# Altium PCB January_PCBA _PSU.PcbDoc
Units mm, origin at the board's own origin, x right, y up, seen from the top; angles counter-clockwise.
Board outline 73.85 x 93.98 mm, 4 copper layers (Top Layer, Layer 1, Layer 2, Bottom Layer), stack 0.603 mm thick; 76 components, 309 nets, 217 pads, 104 vias.
Unrouted connection lines stored in the file: 4.
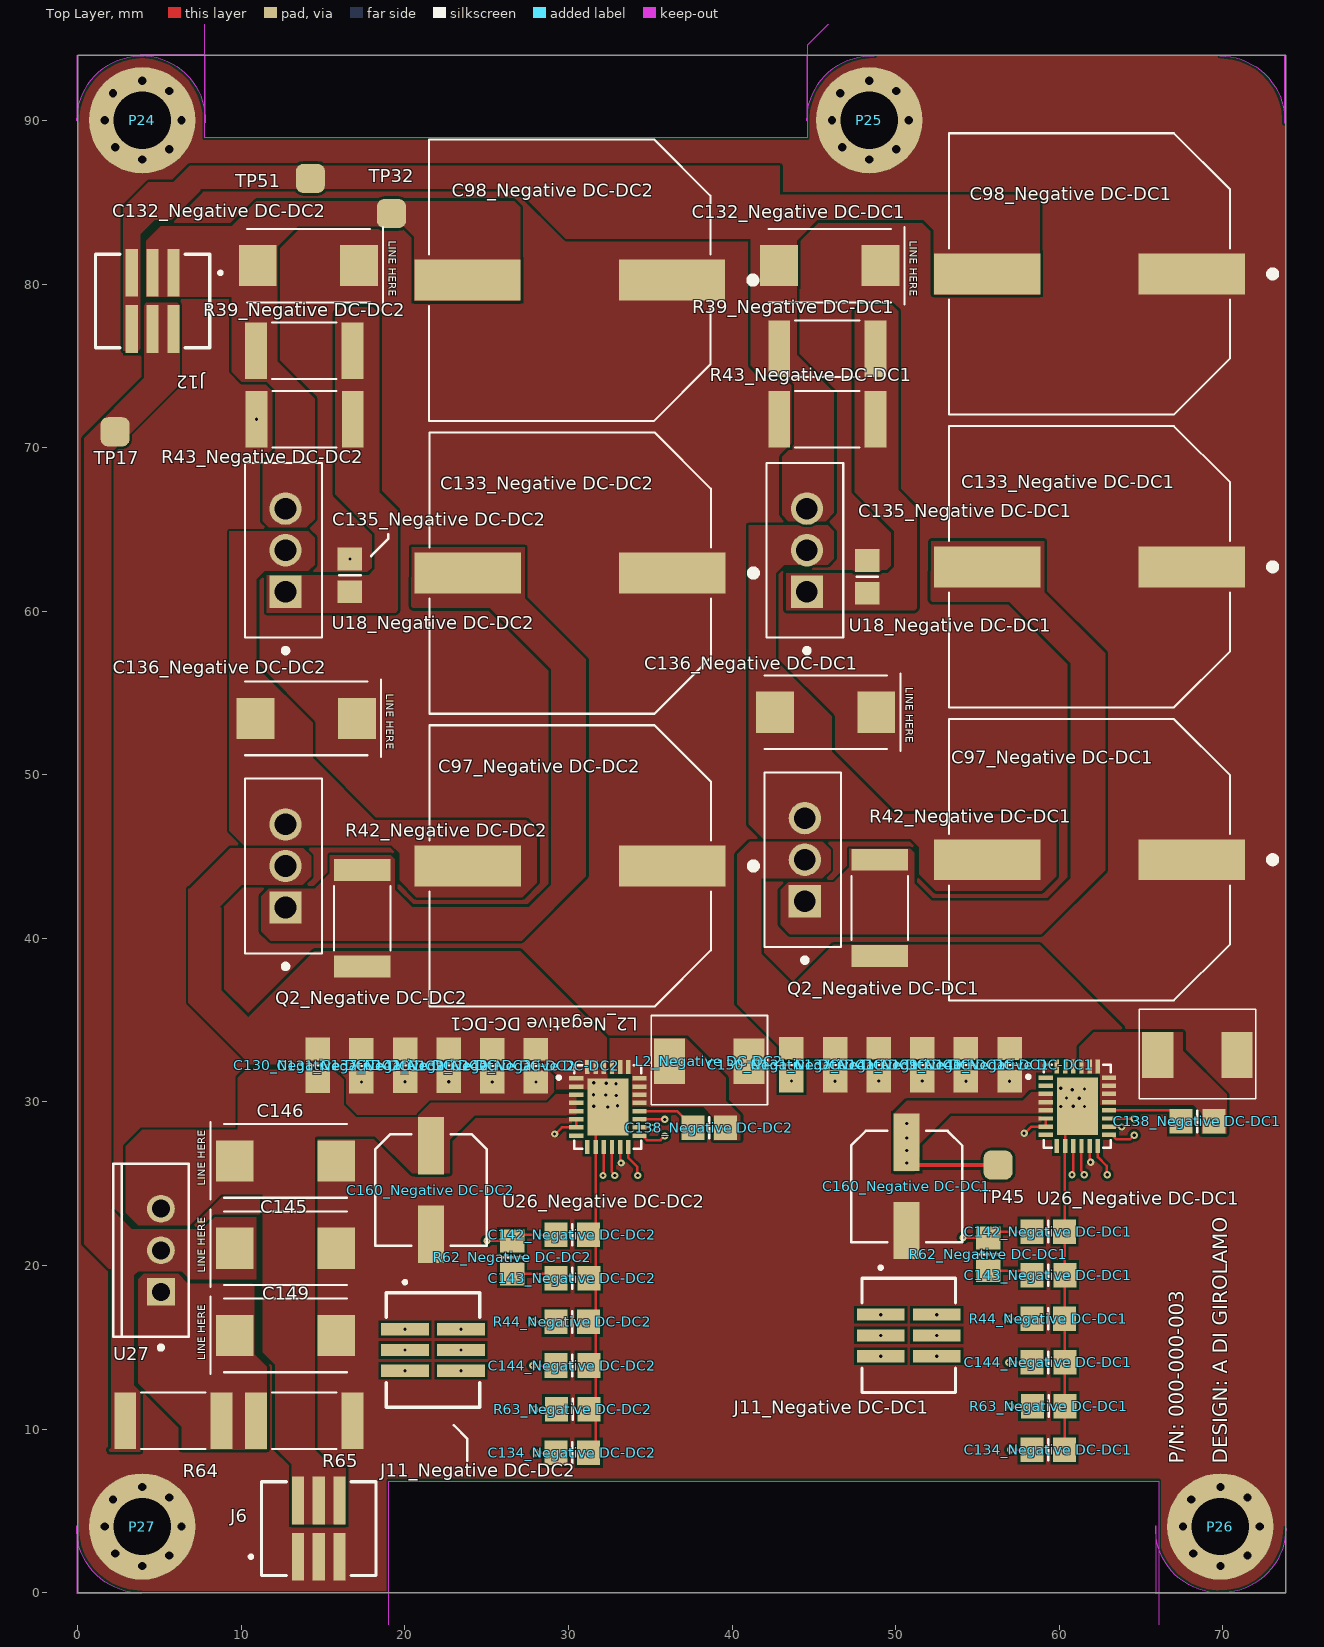
[diagram p0: Top Layer view]
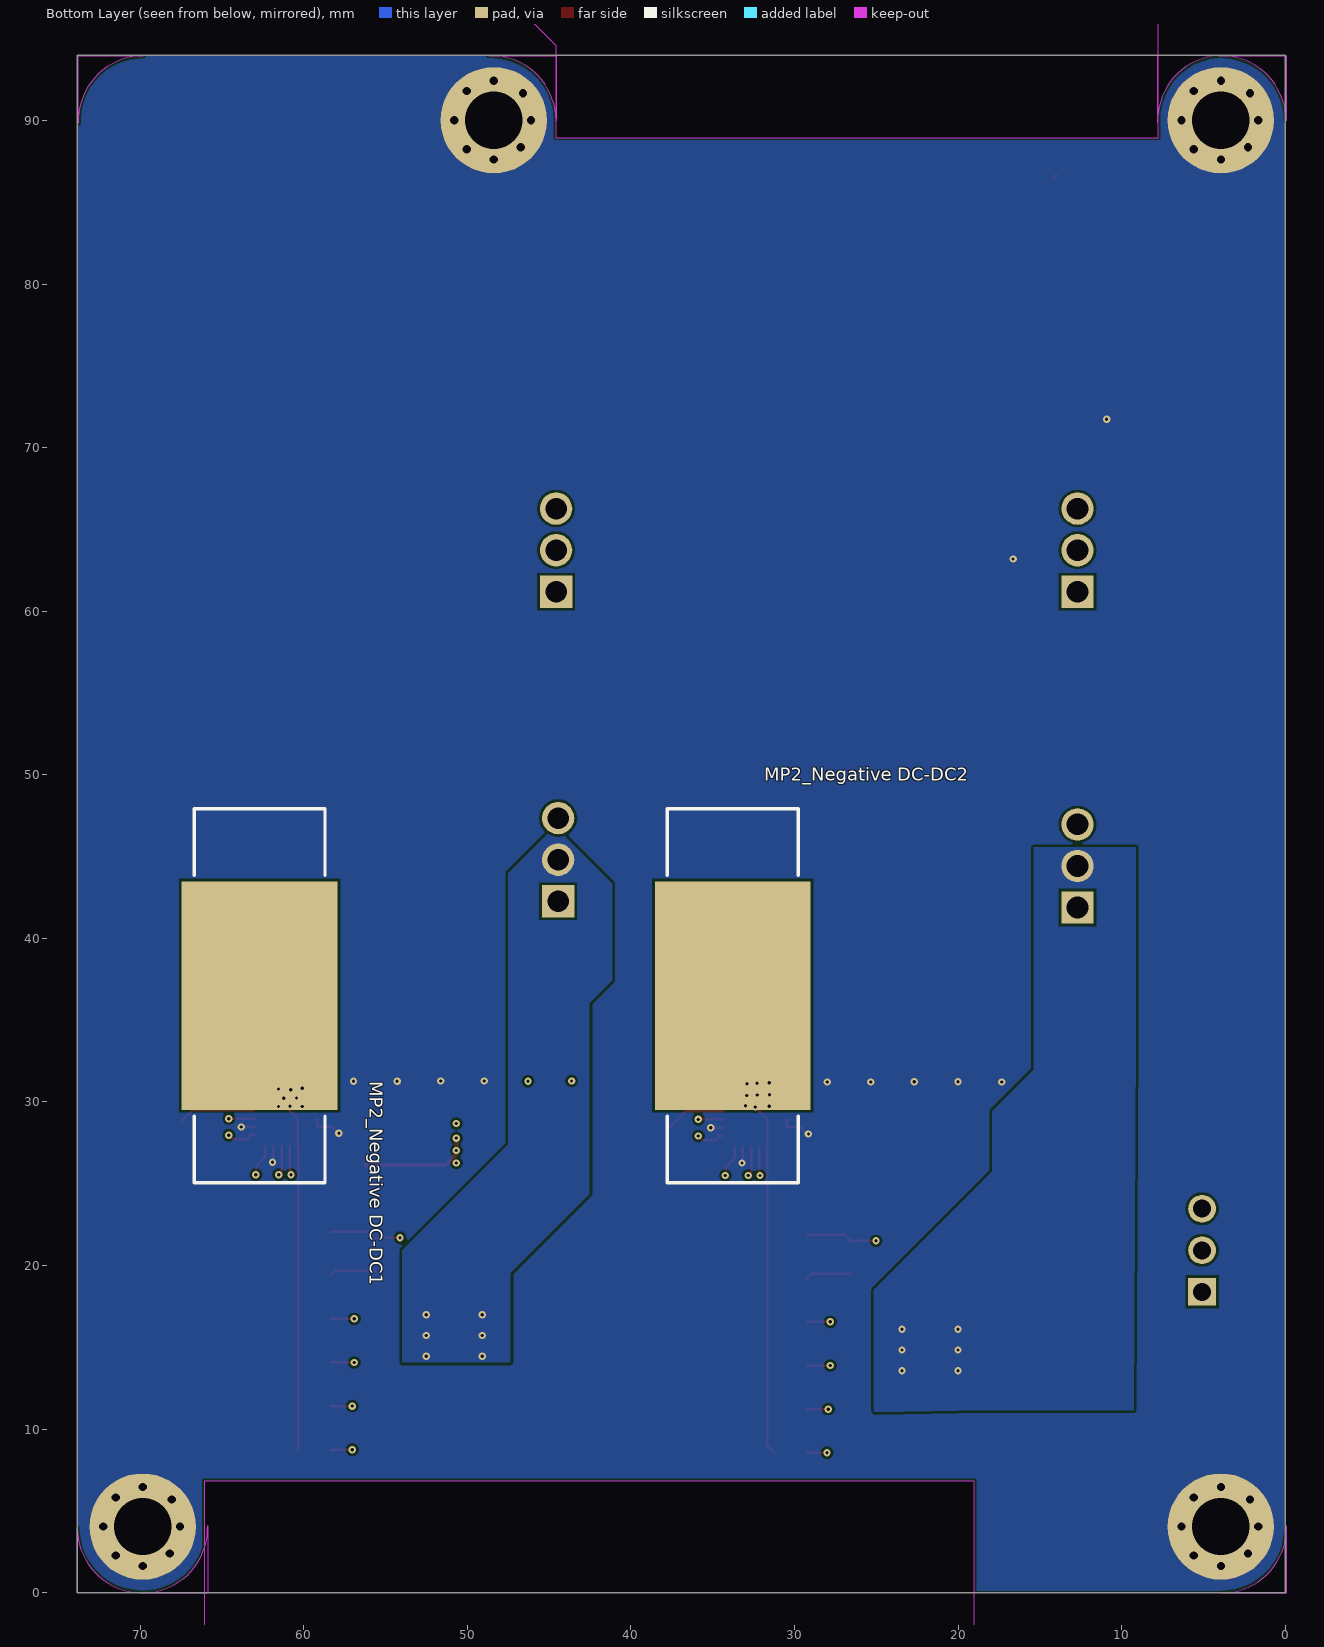
[diagram p1: Bottom Layer view, seen from below]
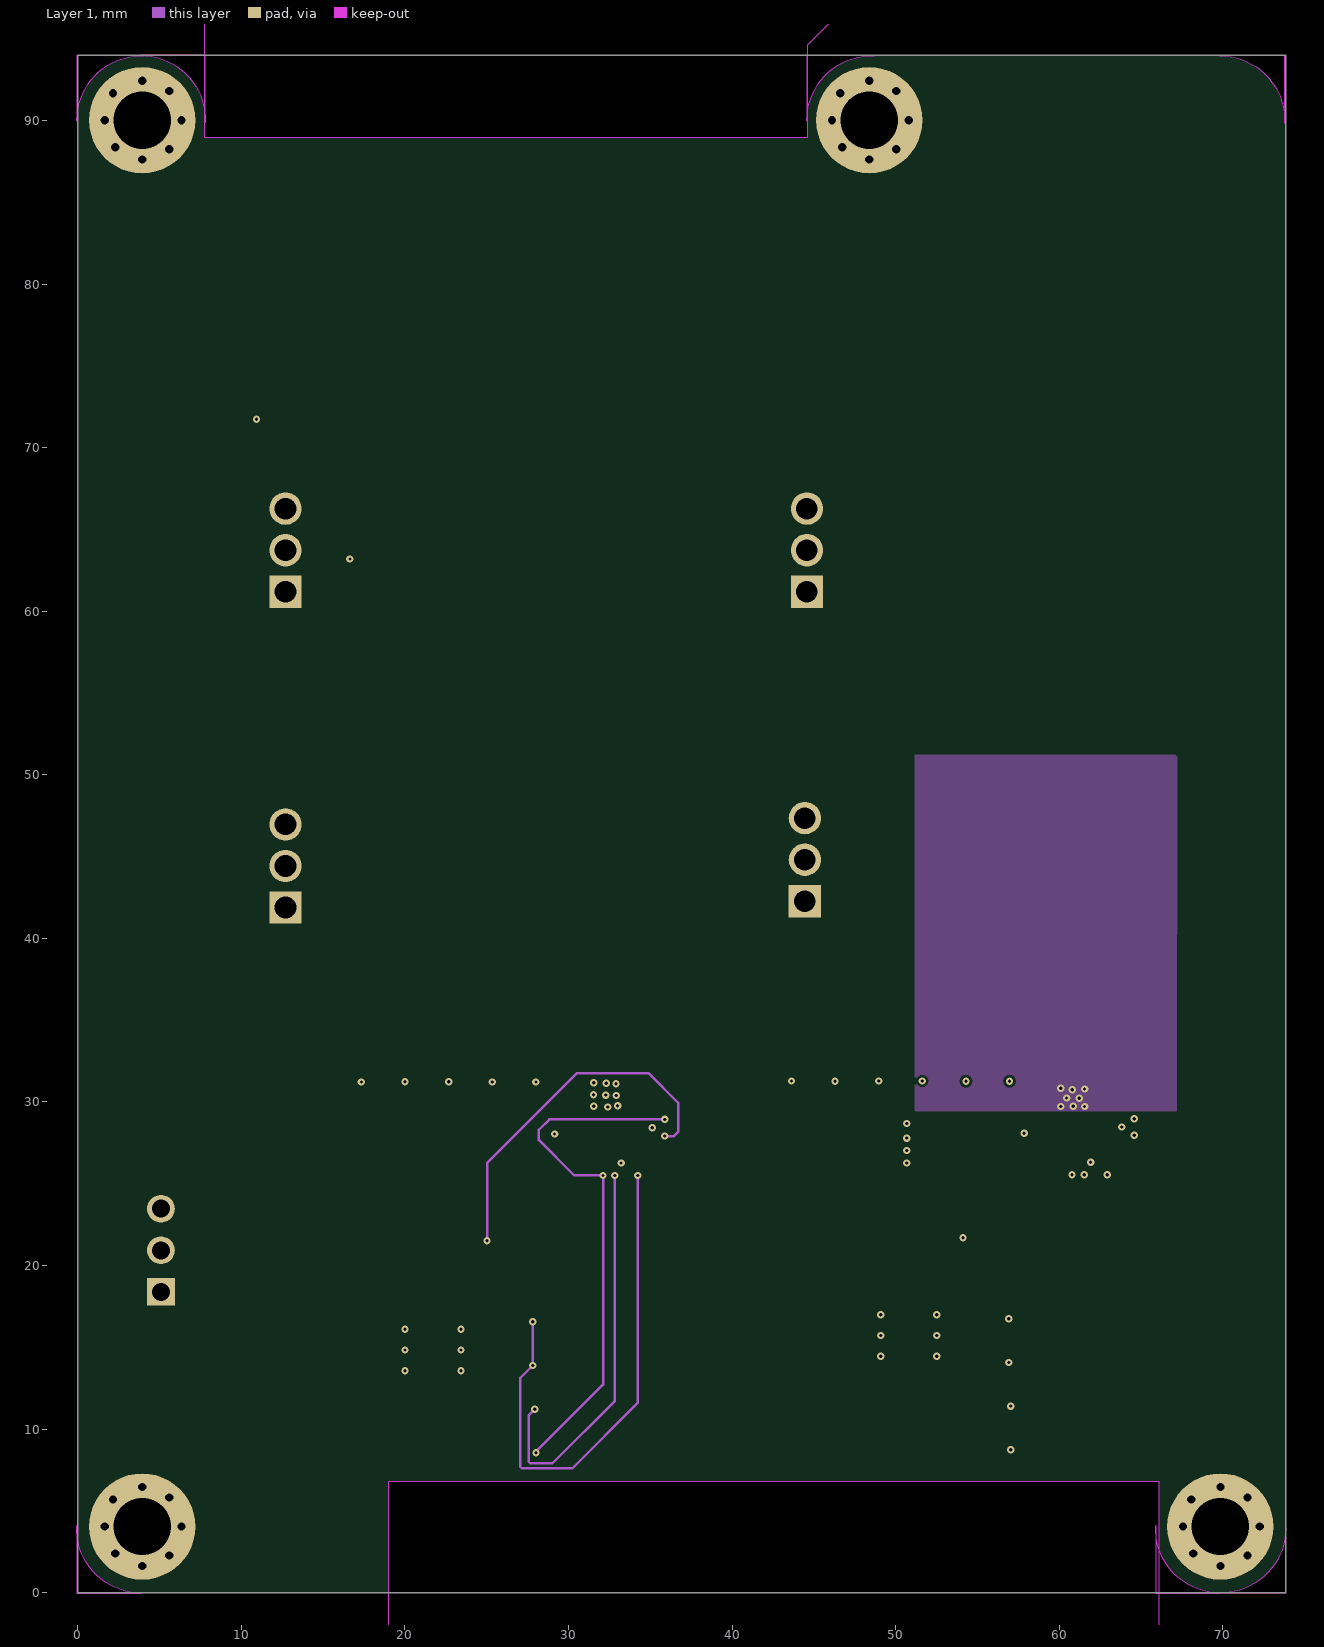
[diagram p2: Layer 1]
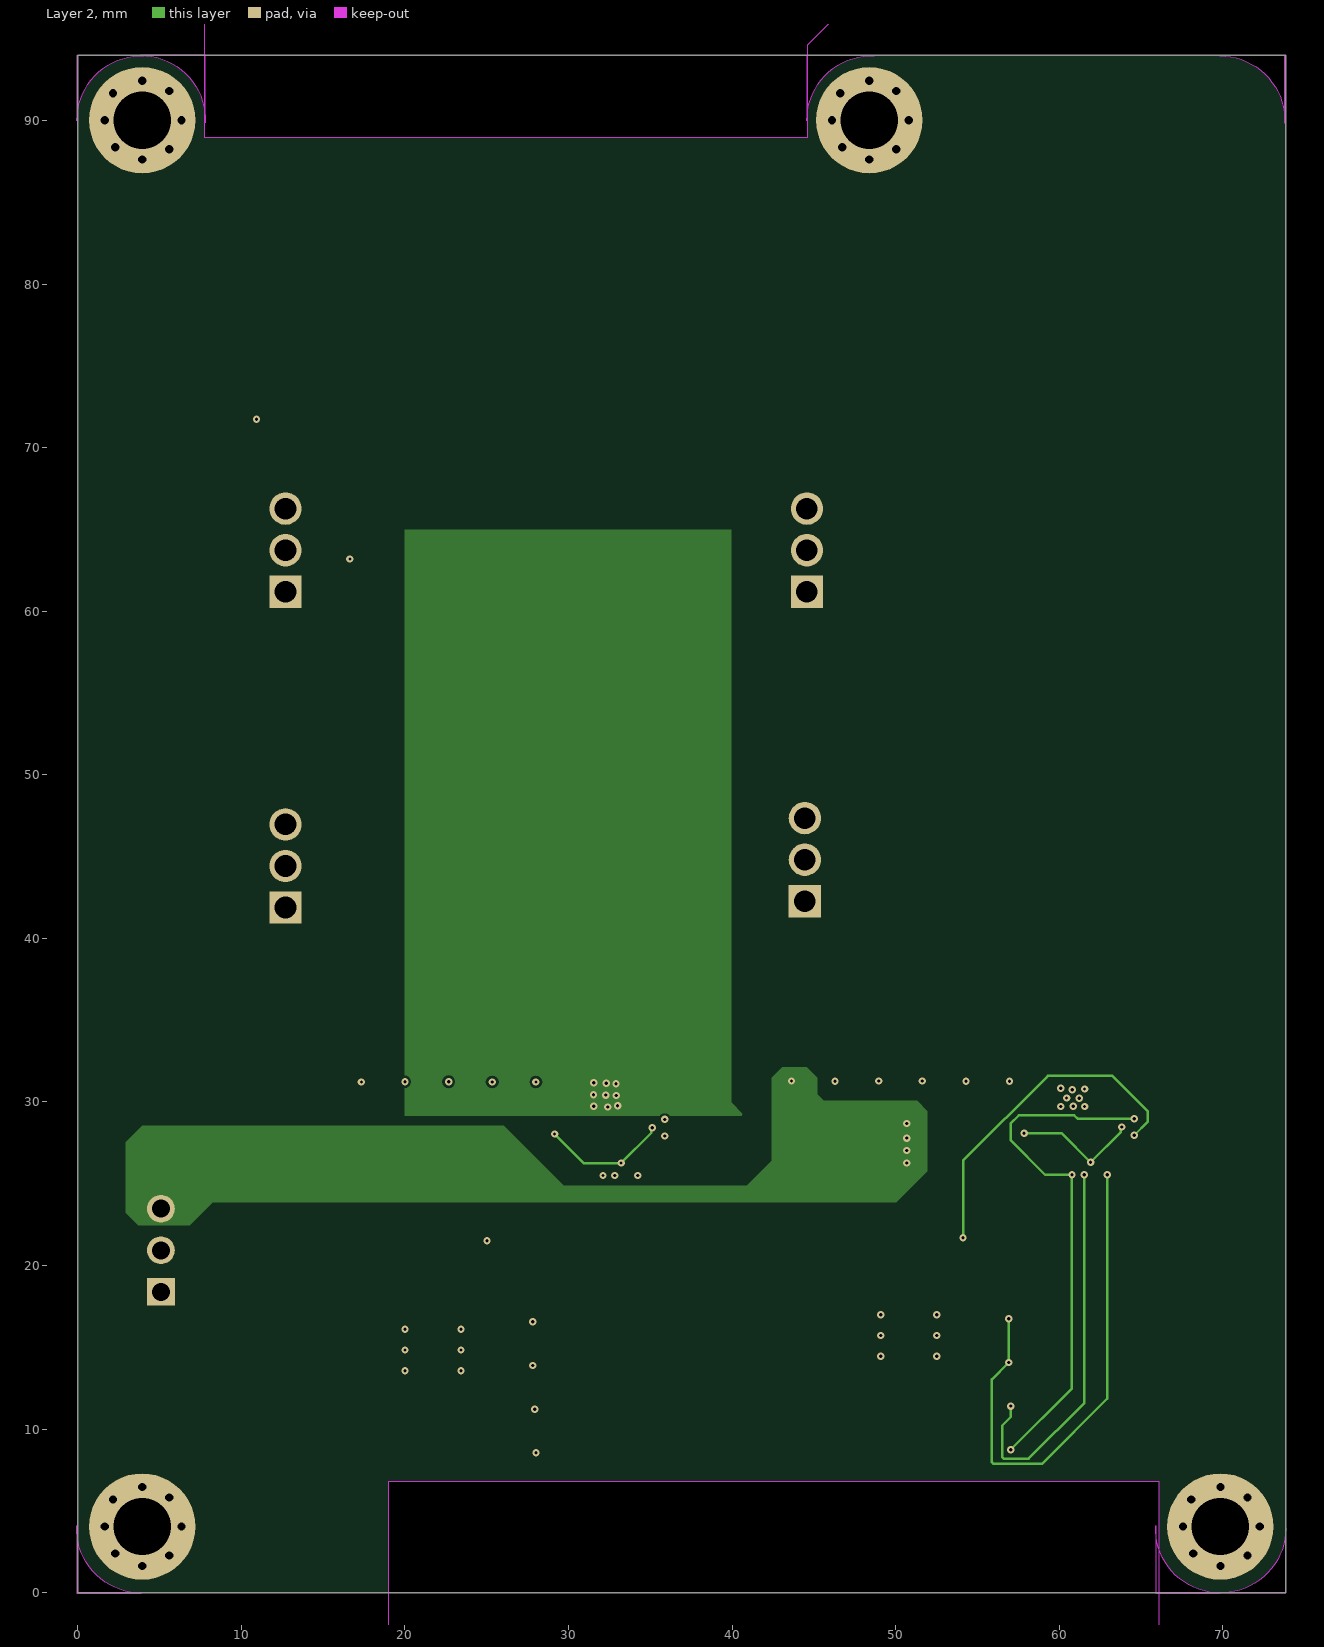
[diagram p3: Layer 2]

## Layer stack, top to bottom
Top Solder: solder mask 0.0102, Solder Resist, Dk 3.5
Top Layer: signal copper 0.0356
Dielectric 2: prepreg 0.0711, PP-006, Dk 4.1
Layer 1: signal copper 0.035
Dielectric 1: dielectric 0.32, FR-4, Dk 4.8
Layer 2: signal copper 0.035
Dielectric 3: prepreg 0.0711, PP-006, Dk 4.1
Bottom Layer: signal copper 0.0356
Bottom Solder: solder mask 0.0102, Solder Resist, Dk 3.5

## Board outline
-0.013,93.98 73.837,93.98 73.84,0 0,0
cut-out: 69.816,93.955 cw(c69.816,89.988) 73.779,89.828 73.779,93.955
cut-out: 44.568,89.991 cw(c48.535,89.991) 48.695,93.955 44.568,93.955
cut-out: -0.059,89.991 cw(c3.907,89.991) 4.067,93.955 -0.059,93.955
cut-out: 3.826,93.98 cw(c3.826,90.014) 7.789,89.853 7.789,93.98
cut-out: 73.844,3.947 cw(c69.877,3.947) 69.717,-0.017 73.844,-0.017
cut-out: 69.847,-0.025 cw(c69.847,3.941) 65.884,4.102 65.884,-0.025
cut-out: 3.887,-0.031 cw(c3.887,3.935) -0.076,4.095 -0.076,-0.031
cut-out: 19.016,-2.235 19.016,6.821 66.082,6.821 66.082,-2.235
cut-out: 7.764,88.944 7.764,96.241 46.212,96.241 44.582,94.611 44.582,88.944

## Design rules (kind name [scope] priority, off if disabled: settings)
Clearance [All] p1: gap=0.152 ignorepadtopadclearanceinfootprint=TRUE
Height [All] p1: minheight=0 maxheight=1000 prefheight=12.7
HoleSize [All] p1: absolutevalues=TRUE maxlimit=25.4 minlimit=0.178 maxpercent=80.000 minpercent=20.000
MinimumAnnularRing [All] p1: minimumring=0.125
PlaneConnect [All] p1: planeconnectstyle=Direct reliefexpansion=0.508 reliefentries=4 reliefconductorwidth=0.254 reliefairgap=0.254
PolygonConnect [All] p1: connectstyle=Direct reliefconductorwidth=0.254 reliefentries=4 polygonreliefangle="90 Angle" airgapwidth=0.254
RoutingVias [All] p1: holewidth=0.711 width=1.27 viastyle="Through Hole" minholewidth=0.711 minwidth=1.27 maxholewidth=0.711 maxwidth=1.27
SolderMaskExpansion [All] p1: expansion=0.102 istentingtop=FALSE
Width [All] p1: maxlimit=25.4 minlimit=0.152 preferedwidth=0.152
27 further rules are at their usual default settings.

## Classes and differential pairs
channel class voltagesource: OPA5481 OPA5482
channel class Small_Relay: "Small Relay 1" "Small Relay 2"
channel class mixer: MIXER1 MIXER2
channel class LOINA: LO1_INA1 LO1_INA2 LO2_INA1 LO2_INA2
channel class LO: LO1 LO2
channel class Large_Relay: "Large Relay 1" "Large Relay 1B" "Large Relay 2" "Large Relay 2B" "Large Relay 3"
channel class high_pass: HP HP2
channel class dcshift_digital: dcshift1 dcshift2
channel class amp: AMP1 AMP2
channel class 7419_SUPPLY: "Negative DC-DC1" "Negative DC-DC2"
channel class 5kHZ_LO_LPF: LO1_HPF LO1_LPF LO2_HPF
component class top_level: J12 TP17 TP32 TP45 TP51
component class Power_Input: J6
component class "Negative DC-DC2": "1_Negative DC-DC2" "C97_Negative DC-DC2" "C98_Negative DC-DC2" "C130_Negative DC-DC2" "C131_Negative DC-DC2" "C132_Negative DC-DC2" "C133_Negative DC-DC2" "C134_Negative DC-DC2" "C135_Negative DC-DC2" "C136_Negative DC-DC2" "C137_Negative DC-DC2" "C138_Negative DC-DC2" "C139_Negative DC-DC2" "C140_Negative DC-DC2" "C141_Negative DC-DC2" "C142_Negative DC-DC2" "C143_Negative DC-DC2" "C144_Negative DC-DC2" "C160_Negative DC-DC2" "J11_Negative DC-DC2" "L2_Negative DC-DC2" "MP2_Negative DC-DC2" "Q2_Negative DC-DC2" "R39_Negative DC-DC2" "R42_Negative DC-DC2" "R43_Negative DC-DC2" "R44_Negative DC-DC2" "R62_Negative DC-DC2" "R63_Negative DC-DC2" "U18_Negative DC-DC2" "U26_Negative DC-DC2"
component class "Negative DC-DC1": "1_Negative DC-DC1" "C97_Negative DC-DC1" "C98_Negative DC-DC1" "C130_Negative DC-DC1" "C131_Negative DC-DC1" "C132_Negative DC-DC1" "C133_Negative DC-DC1" "C134_Negative DC-DC1" "C135_Negative DC-DC1" "C136_Negative DC-DC1" "C137_Negative DC-DC1" "C138_Negative DC-DC1" "C139_Negative DC-DC1" "C140_Negative DC-DC1" "C141_Negative DC-DC1" "C142_Negative DC-DC1" "C143_Negative DC-DC1" "C144_Negative DC-DC1" "C160_Negative DC-DC1" "J11_Negative DC-DC1" "L2_Negative DC-DC1" "MP2_Negative DC-DC1" "Q2_Negative DC-DC1" "R39_Negative DC-DC1" "R42_Negative DC-DC1" "R43_Negative DC-DC1" "R44_Negative DC-DC1" "R62_Negative DC-DC1" "R63_Negative DC-DC1" "U18_Negative DC-DC1" "U26_Negative DC-DC1"
component class MECH: P24 P25 P26 P27
component class "+24 Linear": C145 C146 C149 R64 R65 U27

## Components (designator, comment, footprint, x,y, rotation, side; value= is the part's Value field where it differs from the comment)
"C97_Negative DC-DC1" "1mF" EEVFK1V152M 61.846,44.806 r180 top value=.01uf (schematic designator C97)
"C97_Negative DC-DC2" "1mF" EEVFK1V152M 30.096,44.425 r180 top value=.01uf (schematic designator C97)
"C98_Negative DC-DC1" "1mF" EEVFK1V152M 61.846,80.62 r180 top value=.01uf (schematic designator C98)
"C98_Negative DC-DC2" "1mF" EEVFK1V152M 30.069,80.239 r180 top value=.01uf (schematic designator C98)
"C130_Negative DC-DC1" "478-10836-1-ND" 6-0805_M 43.626,32.28 r270 top value=.1uF (schematic designator C130)
"C130_Negative DC-DC2" "478-10836-1-ND" 6-0805_M 14.669,32.233 r270 top value=.1uF (schematic designator C130)
"C131_Negative DC-DC1" "490-10749-1-ND" 6-0805_M 46.293,32.264 r270 top value=33uF (schematic designator C131)
"C131_Negative DC-DC2" "490-10749-1-ND" 6-0805_M 17.336,32.217 r270 top value=33uF (schematic designator C131)
"C132_Negative DC-DC1" "10uF" Tantalum_2917 45.971,81.128 r180 top (schematic designator C132)
"C132_Negative DC-DC2" "10uF" Tantalum_2917 14.094,81.128 r180 top (schematic designator C132)
"C133_Negative DC-DC1" "1mF" EEVFK1V152M 61.846,62.713 r180 top value=.01uf (schematic designator C133)
"C133_Negative DC-DC2" "1mF" EEVFK1V152M 30.096,62.332 r180 top value=.01uf (schematic designator C133)
"C134_Negative DC-DC1" "1276-6458-1-ND" 6-0805_M 59.322,8.738 r0 top value=2.2uF (schematic designator C134)
"C134_Negative DC-DC2" "1276-6458-1-ND" 6-0805_M 30.223,8.551 r0 top value=2.2uF (schematic designator C134)
"C135_Negative DC-DC1" "490-10749-1-ND" 6-0805_M 48.257,62.094 r90 top value=22uF (schematic designator C135)
"C135_Negative DC-DC2" "490-10749-1-ND" 6-0805_M 16.634,62.189 r90 top value=22uF (schematic designator C135)
"C136_Negative DC-DC1" "10uF" Tantalum_2917 45.717,53.823 r180 top (schematic designator C136)
"C136_Negative DC-DC2" "10uF" Tantalum_2917 13.967,53.442 r180 top (schematic designator C136)
"C137_Negative DC-DC1" "490-10749-1-ND" 6-0805_M 48.96,32.28 r270 top value=22uF (schematic designator C137)
"C137_Negative DC-DC2" "490-10749-1-ND" 6-0805_M 20.003,32.233 r270 top value=22uF (schematic designator C137)
"C138_Negative DC-DC1" "478-10836-1-ND" 6-0805_M 68.45,28.804 r0 top value=.1uF (schematic designator C138)
"C138_Negative DC-DC2" "478-10836-1-ND" 6-0805_M 38.605,28.423 r0 top value=.1uF (schematic designator C138)
"C139_Negative DC-DC1" "490-10749-1-ND" 6-0805_M 54.294,32.264 r270 top value=22uF (schematic designator C139)
"C139_Negative DC-DC2" "490-10749-1-ND" 6-0805_M 25.337,32.217 r270 top value=22uF (schematic designator C139)
"C140_Negative DC-DC1" "490-10749-1-ND" 6-0805_M 56.961,32.264 r270 top value=22uF (schematic designator C140)
"C140_Negative DC-DC2" "490-10749-1-ND" 6-0805_M 28.004,32.217 r270 top value=22uF (schematic designator C140)
"C141_Negative DC-DC1" "490-10749-1-ND" 6-0805_M 51.627,32.28 r270 top value=22uF (schematic designator C141)
"C141_Negative DC-DC2" "490-10749-1-ND" 6-0805_M 22.67,32.233 r270 top value=22uF (schematic designator C141)
"C142_Negative DC-DC1" "399-1151-1-ND" 6-0805_M 59.322,22.073 r0 top value=220pF (schematic designator C142)
"C142_Negative DC-DC2" "399-1151-1-ND" 6-0805_M 30.223,21.886 r0 top value=220pF (schematic designator C142)
"C143_Negative DC-DC1" "399-1153-1-ND" 6-0805_M 59.338,19.406 r0 top value=3.3nF (schematic designator C143)
"C143_Negative DC-DC2" "399-1153-1-ND" 6-0805_M 30.239,19.219 r0 top value=3.3nF (schematic designator C143)
"C144_Negative DC-DC1" "399-7994-1-ND" 6-0805_M 59.338,14.072 r0 top value=22uF (schematic designator C144)
"C144_Negative DC-DC2" "399-7994-1-ND" 6-0805_M 30.239,13.885 r0 top value=22uF (schematic designator C144)
C145 "10uF" Tantalum_2917 12.697,21.057 r0 top
C146 "10uF" Tantalum_2917 12.697,26.391 r0 top
C149 "22uF" Tantalum_2917 12.697,15.723 r0 top
"C160_Negative DC-DC1" "UUD1H220MCL1GS" NIC-CAPA2-6.3X5.8_V 50.67,24.834 r270 top (schematic designator C160)
"C160_Negative DC-DC2" "UUD1H220MCL1GS" NIC-CAPA2-6.3X5.8_V 21.587,24.613 r270 top (schematic designator C160)
J6 "TFC-103-02-F-D" SAMTEC_TFC-103-02-F-D 14.729,3.912 r0 top
"J11_Negative DC-DC1" "TFC-103-02-F-D" SAMTEC_TFC-103-02-F-D 50.797,15.723 r270 top (schematic designator J11)
"J11_Negative DC-DC2" "TFC-103-02-F-D" SAMTEC_TFC-103-02-F-D 21.714,14.834 r270 top (schematic designator J11)
J12 "TFC-103-02-F-D" SAMTEC_TFC-103-02-F-D 4.569,78.969 r180 top
"L2_Negative DC-DC1" "10uH" IHLP2020BZER100M01 68.45,32.868 r180 top (schematic designator L2)
"L2_Negative DC-DC2" "10uH" IHLP2020BZER100M01 38.605,32.487 r180 top (schematic designator L2)
"MP2_Negative DC-DC1" "573100D00010G" FP-573100D00010G-MFG 62.697,36.492 r270 bottom (schematic designator MP2)
"MP2_Negative DC-DC2" "573100D00010G" FP-573100D00010G-MFG 33.772,36.492 r90 bottom (schematic designator MP2)
P24 "M3 Mounting Hole" MH-M3 3.934,90.018 r0 top
P25 "M3 Mounting Hole" MH-M3 48.384,90.018 r0 top
P26 "M3 Mounting Hole" MH-M3 69.847,4.039 r0 top
P27 "M3 Mounting Hole" MH-M3 3.934,4.039 r0 top
"Q2_Negative DC-DC1" "PNP" TO-220-3 44.447,42.266 r90 top (schematic designator Q2)
"Q2_Negative DC-DC2" "PNP" TO-220-3 12.697,41.885 r90 top (schematic designator Q2)
"R39_Negative DC-DC1" "100" 2512_SMD 45.821,76.048 r180 top value=1K (schematic designator R39)
"R39_Negative DC-DC2" "100" 2512_SMD 13.84,75.921 r180 top value=1K (schematic designator R39)
"R42_Negative DC-DC1" "10" 2512_SMD 49.019,41.862 r90 top (schematic designator R42)
"R42_Negative DC-DC2" "10" 2512_SMD 17.396,41.227 r90 top (schematic designator R42)
"R43_Negative DC-DC1" "1909" 2512_SMD 45.821,71.73 r0 top value=1K (schematic designator R43)
"R43_Negative DC-DC2" "1909" 2512_SMD 13.863,71.73 r0 top value=1K (schematic designator R43)
"R44_Negative DC-DC1" "311-360KCRCT-ND" 6-0805_M 59.322,16.739 r180 top value=480K (schematic designator R44)
"R44_Negative DC-DC2" "311-360KCRCT-ND" 6-0805_M 30.223,16.552 r180 top value=480K (schematic designator R44)
"R62_Negative DC-DC1" "P20607CT-ND" 6-0805_M 55.655,20.676 r90 top value=1.33K (schematic designator R62)
"R62_Negative DC-DC2" "P20607CT-ND" 6-0805_M 26.556,20.489 r90 top value=1.33K (schematic designator R62)
"R63_Negative DC-DC1" "P100KCCT-ND" 6-0805_M 59.354,11.405 r180 top value=100K (schematic designator R63)
"R63_Negative DC-DC2" "P100KCCT-ND" 6-0805_M 30.255,11.218 r180 top value=100K (schematic designator R63)
R64 "121" 2512_SMD 5.839,10.516 r180 top value=1K
R65 "2.2K" 2512_SMD 13.84,10.516 r180 top value=1K
TP17 "TP" Test_point 2.283,70.968 r90 top
TP32 "TP" Test_point 19.174,84.303 r90 top
TP45 "TP" Test_point 56.258,26.137 r90 top
TP51 "TP" Test_point 14.221,86.462 r90 top
"U18_Negative DC-DC1" "LT1033" TO-220-3 44.574,61.189 r90 top (schematic designator U18)
"U18_Negative DC-DC2" "LT1033" TO-220-3 12.697,61.189 r90 top (schematic designator U18)
"U26_Negative DC-DC1" "LTC7149IUFD#PBF" QFN50P500X400X80-29N 61.107,29.736 r0 top (schematic designator U26)
"U26_Negative DC-DC2" "LTC7149IUFD#PBF" QFN50P500X400X80-29N 32.404,29.689 r0 top (schematic designator U26)
U27 "LT1085CT#PBF" LT-T-3 5.077,20.93 r180 top

## Footprints (in the part's own frame and the unit in brackets; to place one, negate y for a bottom-side part, rotate by r counter-clockwise, add the part's x,y. Pads: shape width x height; smd on the part's side, far side on the other; paste and mask are expansions set on the pad)
6-0805_M [mm] "Chip Resistor, Body 2.0x1.2mm, IPC Low Density"
  rect 1.4x1.5 smd: 1(-1,0) 2(1,0)
  silkscreen extent 0,-0.65 0,0.65, body extent -1.07,-0.7 1.07,0.7, height 0.7
2512_SMD [mm]
  rect 1.33x3.46 smd: 1(-2.944,0) 2(2.944,0)
  silkscreen extent -1.96,-1.73 1.96,1.73, body extent -3.15,-1.6 3.15,1.6, height 0.7
EEVFK1V152M [mm]
  rect 6.5x2.5 smd: 1(-6.25,0) 2(6.25,0)
  silkscreen extent -11.4,-8.6 8.6,8.6, body extent -8.89,-8.49 8.81,8.51, height 17
FP-573100D00010G-MFG [mm]
  rect 13.97x9.525 smd paste-1000 mask-1000: 1(0,0)
  silkscreen extent -11.43,-4 11.43,4, body extent -11.43,-4 11.43,4, height 10.16
IHLP2020BZER100M01 [mm]
  rect 1.905x2.79 smd: 1(-2.425,0) 2(2.426,0)
  silkscreen extent -3.56,-2.79 3.56,2.67, body extent -2.59,-2.55 2.59,2.55, height 2.54
LT-T-3 [mm] "T, 3-Leads, Body 10.55x4.6mm, Pitch 2.54mm"
  rect 1.7x1.7 hole 1.1: 1(0,2.54)
  round 1.7 hole 1.1: 2(0,0) 3(0,-2.54)
  silkscreen extent -1.7,-5.3 2.9,6.07, body extent -1.7,-5.28 2.9,5.28, height 22.15
MH-M3 [mm]
  round 6.5 hole 3.5: 1(0,0)
NIC-CAPA2-6.3X5.8_V [mm] "Aluminum Electrolytic Capacitor, Diameter 6.3mm, Height 6.1mm, Pitch 5.4mm"
  rect 3.5x1.6 smd: 1(-2.7,0) 2(2.7,0)
  silkscreen extent -3.4,-3.4 3.4,3.4, body extent -3.14,-3.12 3.14,3.15, height 6.1
QFN50P500X400X80-29N [mm]
  rect 0.86x0.27 smd: 1(-1.935,1.75) 2(-1.935,1.25) 3(-1.935,0.75) 4(-1.935,0.25) 5(-1.935,-0.25) 6(-1.935,-0.75) 7(-1.935,-1.25) 8(-1.935,-1.75) 15(1.935,-1.75) 16(1.935,-1.25) 17(1.935,-0.75) 18(1.935,-0.25) 19(1.935,0.25) 20(1.935,0.75) 21(1.935,1.25) 22(1.935,1.75)
  rect 0.27x0.86 smd: 9(-1.25,-2.435) 10(-0.75,-2.435) 11(-0.25,-2.435) 12(0.25,-2.435) 13(0.75,-2.435) 14(1.25,-2.435) 23(1.25,2.435) 24(0.75,2.435) 25(0.25,2.435) 26(-0.25,2.435) 27(-0.75,2.435) 28(-1.25,2.435)
  rect 2.5x3.5 smd paste-3: 29(0,0)
  silkscreen extent -3.1,-2.55 2.05,2.55, body extent -2,-2.5 2,2.5, height 0.8
SAMTEC_TFC-103-02-F-D [mm]
  rect 0.74x2.92 smd: 01(-1.27,-1.715) 02(-1.27,1.715) 03(0,-1.715) 04(0,1.715) 05(1.27,-1.715) 06(1.27,1.715)
  silkscreen extent -4.24,-2.86 3.49,2.86, body extent -3.49,-2.98 3.49,2.98, height 5.74
Tantalum_2917 [mm]
  rect 2.31x2.52 smd: 1(-3.1,0) 2(3.1,0)
  silkscreen extent -4.57,-2.37 3.75,2.37, body extent -3.65,-2.02 3.65,2.28, height 2.81
Test_point [mil] "TP PCB"
  rrect50% 70x70 smd: 1(0,0)
TO-220-3 [mm]
  rect 1.98x1.98 hole 1.32: 1(0,0)
  round 1.98 hole 1.32: 2(2.54,0) 3(5.08,0)
  silkscreen extent -3.74,-2.22 7.88,2.48, body extent -2.44,-1.78 7.52,2.67, height 19.81

## Part data
"C97_Negative DC-DC1" "C97_Negative DC-DC2" "C98_Negative DC-DC1" "C98_Negative DC-DC2" "C133_Negative DC-DC1" "C133_Negative DC-DC2": library part EEV-FK1H102M, "Capacitor, 1mF 50V", ASYPN=EEVFK1V152M, MFGPN=CL21C101JCANNNC
"C130_Negative DC-DC1" "C130_Negative DC-DC2" "C131_Negative DC-DC1" "C131_Negative DC-DC2" "C134_Negative DC-DC1" "C134_Negative DC-DC2" "C135_Negative DC-DC1" "C135_Negative DC-DC2" "C137_Negative DC-DC1" "C137_Negative DC-DC2" "C138_Negative DC-DC1" "C138_Negative DC-DC2" "C139_Negative DC-DC1" "C139_Negative DC-DC2" "C140_Negative DC-DC1" "C140_Negative DC-DC2" "C141_Negative DC-DC1" "C141_Negative DC-DC2" "C142_Negative DC-DC1" "C142_Negative DC-DC2" "C143_Negative DC-DC1" "C143_Negative DC-DC2" "C144_Negative DC-DC1" "C144_Negative DC-DC2": library part Cap, "Capacitor", LatestRevisionDate=17-Jul-2002, LatestRevisionNote="Re-released for DXP Platform.", PackageDescription="Radial Cap, Thru-Hole; 2 Leads; 0.3 in Pin Spacing", PackageReference=RAD-0.3, Published=8-Jun-2000, Publisher="Altium Limited"
  "C130_Negative DC-DC1" "C130_Negative DC-DC2": ASYPN=CL21B104KACNNNC
  "C131_Negative DC-DC1" "C131_Negative DC-DC2" "C135_Negative DC-DC1" "C135_Negative DC-DC2" "C137_Negative DC-DC1" "C137_Negative DC-DC2" "C139_Negative DC-DC1" "C139_Negative DC-DC2" "C140_Negative DC-DC1" "C140_Negative DC-DC2" "C141_Negative DC-DC1" "C141_Negative DC-DC2" "C144_Negative DC-DC1" "C144_Negative DC-DC2": ASYPN=C2012X5R1V226M125AC
  "C134_Negative DC-DC1" "C134_Negative DC-DC2": ASYPN=CL21A225KAFNNNG
  "C138_Negative DC-DC1" "C138_Negative DC-DC2": ASYPN=CL21B105KBFNNNG
  "C142_Negative DC-DC1" "C142_Negative DC-DC2": ASYPN=885012207005
  "C143_Negative DC-DC1" "C143_Negative DC-DC2": ASYPN=08055C332KAT2A
"C132_Negative DC-DC1" "C132_Negative DC-DC2" "C136_Negative DC-DC1" "C136_Negative DC-DC2" C145 C146 C149: library part UVR1V102MHD1TO, "Capacitor, 100uF NICHICON", MFGPN=UVR1V102MHD1TO
  "C132_Negative DC-DC1" "C132_Negative DC-DC2" "C136_Negative DC-DC1" "C136_Negative DC-DC2" C145 C146: ASYPN=T495D106K035ATE260
  C149: ASYPN=T496D226K025ATE800
"C160_Negative DC-DC1" "C160_Negative DC-DC2": library part CMP-0687-00033-1, "Aluminum Electrolytic Capacitor, UD Series, Low Impedance, 22 uF, 50 V, + / - 20%, -55 to 105 degC, Chip Type, 6.3 x 5.8 mm D x L, Pb-Free, Reel", Manufacturer=Nichicon, Rated Capacitance="22 uF", Rated Ripple Current (at 100kHz)="165 mA", Rated Voltage="50 V", Tolerance Rated Capacitance="-20 to 20%", ASYPN=UUD1H220MCL1GS, ComponentLink1Description="Manufacturer URL", ComponentLink1URL=http://www.nichicon.co.jp/, ComponentLink2Description=Datasheet, ComponentLink2URL=http://products.nichicon.co.jp/en/pdf/XJA043/e-ud.pdf, ComponentLink3Description="Package Specification", ComponentLink3URL=http://products.nichicon.co.jp/en/pdf/XJA043/e-ud.pdf, DatasheetVersion=08/2012, Diameter="6.3 mm", Endurance Time="2000 h", Impedance="0.88 Ohm", Length="5.8 mm", Mounting Technology="Surface Mount", PackageDescription="2-Pin Surface Mount Device, Diameter 6.3 mm, Height 5.8 mm, Pitch 5.4 mm", PackageReference=CAPAE-D6.3H5.8, Packing="Dia382mm Reel", PartNumber=UUD1H220MCL1GS, RoHS=TRUE
J6 "J11_Negative DC-DC1" "J11_Negative DC-DC2" J12 "U26_Negative DC-DC1" "U26_Negative DC-DC2": Package=None, Availability=Unavailable, Price=None
  J6 "J11_Negative DC-DC1" "J11_Negative DC-DC2": ASYPN=TFC-103-02-F-D, MF=Samtec, MP=TFC-103-02-F-D
  J12: ASYMFG=SAMTEC, ASYPN=TFC-103-02-F-D, MF=Samtec, MP=TFC-103-02-F-D
  "U26_Negative DC-DC1" "U26_Negative DC-DC2": ASYPN=LTC7149IUFD#PBF, MP=LTC7149IUFD#PBF
"L2_Negative DC-DC1" "L2_Negative DC-DC2": library part IHLP2020BZER100M01, "Inductor 10uH VISHAY", ASYPN=IHLP2020BZER100M01, MFGPN=IHLP2020BZER100M01
"MP2_Negative DC-DC1" "MP2_Negative DC-DC2": library part CMP-69313-000002-1, "HEATSINK SMT D-PAK/TO-252 TIN", Manufacturer="Aavid Thermalloy", Mating Package=D‐Pak, Automotive=No, Category=UNK, ComponentLink2Description=Datasheet, ComponentLink2URL=https://www.shopaavid.com/images/Product/images/Board%20Level%20Cooling-Surface%20Mount%205731%20v1.pdf, Device Class L1=Electromechanical, Device Class L2="Thermal Management", Device Class L3="Heat Sinks", Digikey Description="HEATSINK SMT D-PAK/TO-252 TIN", Height=10.16mm, Lead Free=Yes, Manufacturer Part Number=573100D00010G, Mouser Description="Heat Sinks SLV HEATSINK TO-252", Octopart=https://octopart.com/573100d00010g-aavid+thermalloy-807578, Package=573100D00010G, RoHS=TRUE
P24 P25 P26 P27: library part MH-M3
"Q2_Negative DC-DC1" "Q2_Negative DC-DC2": "PNP General Purpose Amplifier", ComponentLink1Description="Manufacturer Link", ComponentLink1URL=http://www.fairchildsemi.com/, ComponentLink2Description=Datasheet, ComponentLink2URL=http://www.fairchildsemi.com/ds/2N%2F2N3906.pdf, DatasheetVersion=1997, LatestRevisionDate=15-Jan-2003, LatestRevisionNote="PCB Footprint 'BCY-W3/D4.7' replaced", PackageDescription="TO, Flat Index; 3 In-Line, Axial Leads; Body Dia. 4.5mm; Leads 0.51 x 0.48 mm (max)", PackageReference=TO-92A, PackageVersion=Sep-1998, Published=8-Jun-2000, Publisher="Altium Limited"
"R39_Negative DC-DC1" "R39_Negative DC-DC2" "R43_Negative DC-DC1" "R43_Negative DC-DC2" R64 R65: library part RR1220P-104-D, "100K 1% 1/10W", MFGPN=RR1220P-104-D
  "R39_Negative DC-DC1" "R39_Negative DC-DC2": ASYPN=RMCF2512JT100R
  "R43_Negative DC-DC1" "R43_Negative DC-DC2": ASYPN=ERJ-1TNF1911U
  R64: ASYPN=RMCF2512FT121R
  R65: ASYPN=35212K2FT
"R42_Negative DC-DC1" "R42_Negative DC-DC2": library part RNCF0805DTE10R0, "10 ohm 0805", ASYPN=CRCW251210R0FKEG, MFGPN=RNCF0805DTE10R0
"R44_Negative DC-DC1" "R44_Negative DC-DC2" "R62_Negative DC-DC1" "R62_Negative DC-DC2" "R63_Negative DC-DC1" "R63_Negative DC-DC2": library part Res1, "Resistor", LatestRevisionDate=17-Jul-2002, LatestRevisionNote="Re-released for DXP Platform.", PackageDescription="Axial Device, Thru-Hole; 2 Leads; 0.3 in Pin Spacing", PackageReference=AXIAL-0.3, Published=8-Jun-2000, Publisher="Altium Limited"
  "R44_Negative DC-DC1" "R44_Negative DC-DC2": ASYPN=RC0805FR-07475KL
  "R62_Negative DC-DC1" "R62_Negative DC-DC2": ASYPN=RC0805FR-071K33L
  "R63_Negative DC-DC1" "R63_Negative DC-DC2": ASYPN=ERA-6AEB104V
TP17 TP32 TP45 TP51: library part TP_PCB, "Test Point"
"U18_Negative DC-DC1" "U18_Negative DC-DC2": library part LT337
U27: library part CMP-0476-01891-1, "3 A Low Dropout Positive Regulator, 2.55 to 30 V Vin, Adjustable Vout, 3-pin FM (T-3), 0 to 150 degC, Pb-Free", Dropout Voltage(V)=1.3, Manufacturer="Linear Technology", Output Voltage=Adj, ComponentLink1Description="Manufacturer URL", ComponentLink1URL=http://www.linear.com/, ComponentLink2Description=Datasheet, ComponentLink2URL=http://cds.linear.com/docs/en/datasheet/108345fg.pdf, ComponentLink3Description="Package Specification", ComponentLink3URL=http://cds.linear.com/docs/en/packaging/TO-220_3_05-08-1420.pdf, DatasheetVersion="Rev. G", Discrete Pass Element=no, Iout(mA)=3000, Isupply(mA)=5, Mounting Technology="Through Hole", Number of Outputs=1, PackageDescription="3-Pin Plastic TO-220, Body 10.2235 x 4.3815 mm, Pitch 2.54 mm", PackageReference=T-3, PackageVersion=Jun-10, PartNumber=LT1085CT#PBF, PSRR(dB)=75, RoHS=TRUE, Vin Max(V)=30, Vin Min(V)=2.55, Vout Max(V)=28.5, Vout Min(V)=1.25

## Via types
v1: diameter 0.45, hole 0.2, Top Layer to Bottom Layer, tented both sides, 72 vias
v2: diameter 0.5, hole 0.5, Top Layer to Bottom Layer, tented both sides, 32 vias

## Nets (pads, with @x,y where several pads share a name; then routed paths per layer and width w, separated by ;. In a path a pad name is that pad's centre, name@x,y a point inside that pad or via, vN(x,y) a via of type N, cw(c..) or ccw(c..) an arc to the next point about the centre after c; other vN are vias at no path point)
1V8d: 
2V5: 
3v3: 
3v3_2: 
5V: 
5Vd: 
24V_548: 
-5V: 
-5Vd: 
-24V_548_HF: 
-24V_548_LF: 
-24V_HF: 
-24V_LF: 
ADC_CONV: 
ADC_SCK: 
ADC_SDO: 
AGND: 
ALCC: 
B\U\S\Y\: 
C\S\_LO1: 
C\S\_LO2: 
CHRG: 
CLK_MODE_SEL_LO1: 
CLK_MODE_SEL_LO2: 
FAULT: 
GND: "C97_Negative DC-DC1.1" "C97_Negative DC-DC2.1" "C98_Negative DC-DC1.1" "C98_Negative DC-DC2.1" "C131_Negative DC-DC1.2" "C131_Negative DC-DC2.2" "C132_Negative DC-DC1.1" "C132_Negative DC-DC2.1" "C133_Negative DC-DC1.1" "C133_Negative DC-DC2.1" "C135_Negative DC-DC1.2" "C135_Negative DC-DC2.2" "C136_Negative DC-DC1.1" "C136_Negative DC-DC2.1" "C137_Negative DC-DC1.2" "C137_Negative DC-DC2.2" "C139_Negative DC-DC1.2" "C139_Negative DC-DC2.2" "C140_Negative DC-DC1.2" "C140_Negative DC-DC2.2" "C141_Negative DC-DC1.2" "C141_Negative DC-DC2.2" "C160_Negative DC-DC1.2" "C160_Negative DC-DC2.2" "L2_Negative DC-DC1.1" "L2_Negative DC-DC2.1" "R43_Negative DC-DC1.1" "R43_Negative DC-DC2.1" "U26_Negative DC-DC1.6" "U26_Negative DC-DC1.7" "U26_Negative DC-DC1.13" "U26_Negative DC-DC1.16" "U26_Negative DC-DC2.6" "U26_Negative DC-DC2.7" "U26_Negative DC-DC2.13" "U26_Negative DC-DC2.16" C145.2 C146.2 C149.2 J6.01 J6.03 J6.05 P24.1 P25.1 P26.1 P27.1 R65.1 | length 23.1
  Top Layer w0.152: v1(29.147,28.042) 29.2,28.042 29.597,28.439 30.469,28.439 30.469,28.939 ; 33.154,27.254 33.154,26.374 33.211,26.317 v1(33.211,26.264) ; 34.339,28.439 34.347,28.431 35.108,28.431 v1(35.116,28.423) ; v1(57.85,28.089) 57.903,28.089 58.3,28.486 59.172,28.486 59.172,28.986 ; 61.857,27.301 61.857,26.421 61.914,26.364 v1(61.914,26.311) ; 63.042,28.486 63.05,28.478 63.811,28.478 v1(63.819,28.47)
  Layer 2 w0.152: v1(29.147,28.042) 30.925,26.264 v1(33.211,26.264) 35.059,28.112 35.059,28.366 v1(35.116,28.423) ; v1(57.85,28.089) 60.136,28.089 v1(61.914,26.311) 63.762,28.159 63.762,28.413 v1(63.819,28.47)
  other v1: 17.336,31.217 25.337,31.217 28.004,31.217 20.003,31.233 22.67,31.233 46.293,31.264 54.294,31.264 56.961,31.264 48.96,31.28 51.627,31.28 16.634,63.189 10.919,71.73
  other v2: 3.934,1.626 69.847,1.626 5.585,2.261 71.498,2.261 2.283,2.388 68.196,2.388 1.648,4.039 6.347,4.039 67.561,4.039 72.26,4.039 2.156,5.69 68.069,5.69 5.585,5.817 71.498,5.817 3.934,6.452 69.847,6.452 3.934,87.605 48.384,87.605 5.585,88.24 50.035,88.24 2.283,88.367 46.733,88.367 1.648,90.018 6.347,90.018 46.098,90.018 50.797,90.018 2.156,91.669 46.606,91.669 5.585,91.796 50.035,91.796 3.934,92.431 48.384,92.431
GND_2: 
IO_UPDATE_LO1: 
IO_UPDATE_LO2: 
NetC13_2: 
NetC14_2: 
NetC28_HP2_1: 
NetC28_HP2_2: 
NetC28_HP_1: 
NetC28_HP_2: 
NetC29_HP2_2: 
NetC29_HP_2: 
NetC31_1: 
NetC31_2: 
NetC33_1: 
NetC33_2: 
NetC38_1: 
NetC38_2: 
NetC39_2: 
NetC48_2: 
NetC50_1: 
NetC50_2: 
NetC52_1: 
NetC53_1: 
NetC83_LO1_1: 
NetC83_LO2_1: 
NetC90_2: 
NetC93_1: 
NetC93_2: 
NetC96_1: 
"NetC97_Negative DC-DC1_2": "C97_Negative DC-DC1.2" "C136_Negative DC-DC1.2" "Q2_Negative DC-DC1.3" "U18_Negative DC-DC1.2"
"NetC97_Negative DC-DC2_2": "C97_Negative DC-DC2.2" "C136_Negative DC-DC2.2" "Q2_Negative DC-DC2.3" "U18_Negative DC-DC2.2"
"NetC98_Negative DC-DC1_2": "C98_Negative DC-DC1.2" "C132_Negative DC-DC1.2" "R39_Negative DC-DC1.2" "U18_Negative DC-DC1.3" J12.05 J12.06 TP51.1 | length 0.3
  Top Layer w0.152: TP51.1@14.002,86.68 TP51.1
"NetC98_Negative DC-DC2_2": "C98_Negative DC-DC2.2" "C132_Negative DC-DC2.2" "R39_Negative DC-DC2.2" "U18_Negative DC-DC2.3" J12.01 J12.03 TP32.1
NetC99_1: 
NetC99_2: 
NetC100_2: 
NetC105_1: 
NetC105_2: 
NetC106_2: 
NetC111_1: 
NetC111_2: 
NetC112_2: 
NetC117_LO1_HPF_1: 
NetC117_LO1_HPF_2: 
NetC117_LO1_LPF_1: 
NetC117_LO1_LPF_2: 
NetC117_LO2_HPF_1: 
NetC117_LO2_HPF_2: 
NetC118_LO1_HPF_2: 
NetC118_LO1_LPF_2: 
NetC118_LO2_HPF_2: 
NetC123_1: 
NetC123_2: 
NetC124_2: 
"NetC130_Negative DC-DC1_1": "C130_Negative DC-DC1.1" "C131_Negative DC-DC1.1" "C134_Negative DC-DC1.2" "C137_Negative DC-DC1.1" "C139_Negative DC-DC1.1" "C140_Negative DC-DC1.1" "C141_Negative DC-DC1.1" "C142_Negative DC-DC1.2" "C143_Negative DC-DC1.2" "C144_Negative DC-DC1.2" "J11_Negative DC-DC1.01" "J11_Negative DC-DC1.02" "J11_Negative DC-DC1.03" "J11_Negative DC-DC1.04" "J11_Negative DC-DC1.05" "J11_Negative DC-DC1.06" "MP2_Negative DC-DC1.1" "Q2_Negative DC-DC1.2" "R42_Negative DC-DC1.1" "R44_Negative DC-DC1.1" "R63_Negative DC-DC1.1" "U26_Negative DC-DC1.1" "U26_Negative DC-DC1.2" "U26_Negative DC-DC1.10" "U26_Negative DC-DC1.26" "U26_Negative DC-DC1.27" "U26_Negative DC-DC1.28" "U26_Negative DC-DC1.29" | length 21.3
  Top Layer w0.152: 60.322,8.738 60.322,16.739 60.322,22.073 60.322,27.266 60.357,27.301 60.357,28.986 61.107,29.736
  other v1: 49.082,14.453 52.512,14.453 49.082,15.723 52.512,15.723 49.082,16.993 52.512,16.993 60.097,29.717 61.547,29.717 60.847,29.742 61.222,30.217 60.447,30.242 60.797,30.742 61.547,30.792 60.097,30.842
"NetC130_Negative DC-DC1_2": "C130_Negative DC-DC1.2" "C130_Negative DC-DC2.2" "C160_Negative DC-DC1.1" "C160_Negative DC-DC2.1" "U26_Negative DC-DC1.3" "U26_Negative DC-DC1.4" "U26_Negative DC-DC1.5" "U26_Negative DC-DC2.3" "U26_Negative DC-DC2.4" "U26_Negative DC-DC2.5" C146.1 J6.02 J6.04 J6.06 TP45.1 U27.3 | length 6.6
  Top Layer w0.254: 50.67,27.534 v1(50.67,27.026) 50.67,26.81 51.343,26.137 TP45.1
  other v1: 50.67,26.264 50.67,27.788 50.67,28.677 43.626,31.28
"NetC130_Negative DC-DC2_1": "C130_Negative DC-DC2.1" "C131_Negative DC-DC2.1" "C134_Negative DC-DC2.2" "C137_Negative DC-DC2.1" "C139_Negative DC-DC2.1" "C140_Negative DC-DC2.1" "C141_Negative DC-DC2.1" "C142_Negative DC-DC2.2" "C143_Negative DC-DC2.2" "C144_Negative DC-DC2.2" "J11_Negative DC-DC2.01" "J11_Negative DC-DC2.02" "J11_Negative DC-DC2.03" "J11_Negative DC-DC2.04" "J11_Negative DC-DC2.05" "J11_Negative DC-DC2.06" "MP2_Negative DC-DC2.1" "Q2_Negative DC-DC2.2" "R42_Negative DC-DC2.1" "R44_Negative DC-DC2.1" "R63_Negative DC-DC2.1" "U26_Negative DC-DC2.1" "U26_Negative DC-DC2.2" "U26_Negative DC-DC2.10" "U26_Negative DC-DC2.26" "U26_Negative DC-DC2.27" "U26_Negative DC-DC2.28" "U26_Negative DC-DC2.29" | length 21.6
  Top Layer w0.152: 31.223,8.551 31.654,8.982 31.654,27.254 31.654,28.939 v1(32.404,29.689)
  other v1: 19.999,13.564 23.429,13.564 19.999,14.834 23.429,14.834 19.999,16.104 23.429,16.104 31.547,29.742 32.997,29.767 32.922,30.392 32.272,30.417 31.522,30.442 32.897,31.117 32.297,31.142 31.547,31.167
"NetC133_Negative DC-DC1_2": "C133_Negative DC-DC1.2" "Q2_Negative DC-DC1.1" "R42_Negative DC-DC1.2"
"NetC133_Negative DC-DC2_2": "C133_Negative DC-DC2.2" "Q2_Negative DC-DC2.1" "R42_Negative DC-DC2.2"
"NetC134_Negative DC-DC1_1": "C134_Negative DC-DC1.1" "U26_Negative DC-DC1.11" "U26_Negative DC-DC1.17" | length 36.5
  Top Layer w0.152: v1(57.036,8.738) 58.322,8.738 ; v1(60.775,25.549) 60.775,25.607 60.857,25.688 60.857,27.301 ; 63.042,28.986 63.046,28.982 64.577,28.982 v1(64.581,28.978)
  Layer 2 w0.152: v1(57.036,8.738) 60.775,12.478 v1(60.775,25.549) 59.131,25.549 57.02,27.661 57.02,28.677 57.528,29.185 60.911,29.185 61.117,28.978 v1(64.581,28.978)
"NetC134_Negative DC-DC2_1": "C134_Negative DC-DC2.1" "U26_Negative DC-DC2.11" "U26_Negative DC-DC2.17" | length 36.6
  Top Layer w0.152: v1(28.009,8.551) 29.223,8.551 ; v1(32.107,25.502) 32.154,25.548 32.154,27.254 ; 34.339,28.939 34.343,28.935 35.874,28.935 v1(35.878,28.931)
  Layer 1 w0.152: v1(28.009,8.551) 28.009,8.624 32.107,12.722 v1(32.107,25.502) 30.35,25.502 28.191,27.661 28.191,28.296 28.826,28.931 v1(35.878,28.931)
"NetC135_Negative DC-DC1_1": "C135_Negative DC-DC1.1" "R39_Negative DC-DC1.1" "R43_Negative DC-DC1.2" "U18_Negative DC-DC1.1"
"NetC135_Negative DC-DC2_1": "C135_Negative DC-DC2.1" "R39_Negative DC-DC2.1" "R43_Negative DC-DC2.2" "U18_Negative DC-DC2.1"
"NetC138_Negative DC-DC1_1": "C138_Negative DC-DC1.1" "U26_Negative DC-DC1.18" | length 4.7
  Top Layer w0.152: 63.042,29.486 66.817,29.486 67.45,28.854 67.45,28.804
"NetC138_Negative DC-DC1_2": "C138_Negative DC-DC1.2" "L2_Negative DC-DC1.2" "U26_Negative DC-DC1.19" "U26_Negative DC-DC1.20" "U26_Negative DC-DC1.21" "U26_Negative DC-DC1.22" "U26_Negative DC-DC1.23" "U26_Negative DC-DC1.24" "U26_Negative DC-DC1.25"
"NetC138_Negative DC-DC2_1": "C138_Negative DC-DC2.1" "U26_Negative DC-DC2.18" | length 3.7
  Top Layer w0.152: 34.339,29.439 36.639,29.439 37.605,28.473 37.605,28.423
"NetC138_Negative DC-DC2_2": "C138_Negative DC-DC2.2" "L2_Negative DC-DC2.2" "U26_Negative DC-DC2.19" "U26_Negative DC-DC2.20" "U26_Negative DC-DC2.21" "U26_Negative DC-DC2.22" "U26_Negative DC-DC2.23" "U26_Negative DC-DC2.24" "U26_Negative DC-DC2.25"
"NetC142_Negative DC-DC1_1": "C142_Negative DC-DC1.1" "R62_Negative DC-DC1.2" "U26_Negative DC-DC1.15" | length 27.1
  Top Layer w0.152: v1(54.115,21.692) 55.639,21.692 55.655,21.676 56.052,22.073 58.322,22.073 ; 63.042,27.986 63.337,27.986 63.345,27.978 63.345,27.857 63.493,27.708 64.327,27.708 v1(64.581,27.962)
  Layer 2 w0.152: v1(54.115,21.692) 54.115,26.407 59.3,31.592 63.249,31.592 65.402,29.439 65.402,28.783 v1(64.581,27.962)
"NetC142_Negative DC-DC2_1": "C142_Negative DC-DC2.1" "R62_Negative DC-DC2.2" "U26_Negative DC-DC2.15" | length 28.4
  Top Layer w0.152: v1(25.016,21.505) 26.54,21.505 26.556,21.489 26.953,21.886 29.223,21.886 ; 34.339,27.939 34.634,27.939 34.642,27.931 34.642,27.81 34.791,27.661 35.624,27.661 v1(35.878,27.915)
  Layer 1 w0.152: v1(25.016,21.505) 25.016,26.264 30.519,31.767 34.88,31.767 36.7,29.947 36.7,28.169 36.446,27.915 v1(35.878,27.915)
"NetC143_Negative DC-DC1_1": "C143_Negative DC-DC1.1" "R62_Negative DC-DC1.1" | length 2.8
  Top Layer w0.152: 55.655,19.676 58.068,19.676 58.338,19.406
"NetC143_Negative DC-DC2_1": "C143_Negative DC-DC2.1" "R62_Negative DC-DC2.1" | length 2.8
  Top Layer w0.152: 26.556,19.489 28.969,19.489 29.239,19.219
"NetC144_Negative DC-DC1_1": "C144_Negative DC-DC1.1" "R44_Negative DC-DC1.2" "U26_Negative DC-DC1.14" | length 36.5
  Top Layer w0.152: v1(56.909,14.072) 58.338,14.072 ; v1(56.909,16.739) 58.322,16.739 ; 62.357,27.301 62.357,26.63 62.892,26.095 62.892,25.587 v1(62.93,25.549)
  Layer 2 w0.152: v1(56.909,16.739) v1(56.909,14.072) 55.877,13.04 55.877,7.976 55.966,7.887 58.962,7.887 62.93,11.854 v1(62.93,25.549)
"NetC144_Negative DC-DC2_1": "C144_Negative DC-DC2.1" "R44_Negative DC-DC2.2" "U26_Negative DC-DC2.14" | length 36.8
  Top Layer w0.152: v1(27.81,13.885) 29.239,13.885 ; v1(27.81,16.552) 29.223,16.552 ; 33.654,27.254 33.654,26.583 34.189,26.048 34.189,25.54 v1(34.227,25.502)
  Layer 1 w0.152: v1(27.81,16.552) v1(27.81,13.885) 27.048,13.123 27.048,7.695 27.137,7.606 30.234,7.606 34.227,11.599 v1(34.227,25.502)
NetC145_1: C145.1 J12.02 J12.04 R64.2 TP17.1 U27.2
NetC149_1: C149.1 R64.1 R65.2 U27.1
NetD2_1: 
NetD3_OPA5481_2: 
NetD3_OPA5482_2: 
NetJ1_1: 
NetJ1_2: 
NetJ2_2: 
NetJ2_3: 
NetJ5_07: 
NetJ5_08: 
NetJ5_09: 
NetJ5_10: 
NetJ7_01: 
NetJ7_02: 
NetJ9_01: 
NetJ9_02: 
NetJ9_03: 
NetJ9_04: 
NetJ9_05: 
NetJ9_06: 
NetJ9_07: 
NetJ9_08: 
NetJ10_1: 
NetJ14_02: 
NetJ15_01: 
NetJ15_02: 
"NetK1_Large Relay 1_1": 
"NetK1_Large Relay 1_2": 
"NetK1_Large Relay 2_1": 
"NetK1_Large Relay 2_2": 
"NetK1_Large Relay 3_1": 
"NetK1_Large Relay 3_2": 
"NetK2_Small Relay 1_2": 
"NetK2_Small Relay 2_2": 
NetL1_1: 
NetP13_1: 
NetP13_2: 
NetP13_3: 
NetQ1_OPA5481_1: 
NetQ1_OPA5481_2: 
NetQ1_OPA5482_1: 
NetQ1_OPA5482_2: 
NetR1_1: 
NetR2_1: 
NetR2_2: 
NetR3_2: 
NetR5_1: 
NetR6_2: 
NetR7_1: 
NetR7_2: 
NetR8_AMP1_1: 
NetR8_AMP2_1: 
NetR10_HP2_2: 
NetR10_HP_2: 
NetR14_2: 
NetR15_dcshift1_2: 
NetR15_dcshift2_2: 
NetR17_1: 
NetR17_2: 
NetR18_1: 
NetR18_2: 
NetR19_LO1_1: 
NetR19_LO2_1: 
NetR20_1: 
NetR24_OPA5481_1: 
NetR24_OPA5482_1: 
NetR25_OPA5481_1: 
NetR25_OPA5481_2: 
NetR25_OPA5482_1: 
NetR25_OPA5482_2: 
NetR27_LO1_1: 
NetR27_LO2_1: 
NetR28_LO1_1: 
NetR28_LO2_1: 
NetR29_LO1_1: 
NetR29_LO2_1: 
NetR30_LO1_2: 
NetR30_LO2_2: 
NetR31_LO1_1: 
NetR31_LO2_1: 
NetR35_LO1_1: 
NetR35_LO2_1: 
NetR38_2: 
NetR40_1: 
"NetR63_Negative DC-DC1_2": "R63_Negative DC-DC1.2" "U26_Negative DC-DC1.12" | length 26.9
  Top Layer w0.152: v1(57.036,11.405) 58.354,11.405 ; 61.357,27.301 61.357,25.778 61.533,25.602 v1(61.533,25.549)
  Layer 2 w0.152: v1(57.036,11.405) 57.036,10.738 56.512,10.214 56.512,8.281 56.601,8.192 58.124,8.192 61.533,11.6 v1(61.533,25.549)
"NetR63_Negative DC-DC2_2": "R63_Negative DC-DC2.2" "U26_Negative DC-DC2.12" | length 27.2
  Top Layer w0.152: v1(27.937,11.218) 29.255,11.218 ; 32.654,27.254 32.654,25.731 32.83,25.555 v1(32.83,25.502)
  Layer 1 w0.152: v1(27.937,11.218) 27.556,10.837 27.556,8 27.645,7.911 29.014,7.911 32.83,11.726 v1(32.83,25.502)
NetR66_dcshift1_1: 
NetR66_dcshift2_1: 
NetR69_LO1_INA1_1: 
NetR69_LO1_INA1_2: 
NetR69_LO1_INA2_1: 
NetR69_LO1_INA2_2: 
NetR69_LO2_INA1_1: 
NetR69_LO2_INA1_2: 
NetR69_LO2_INA2_1: 
NetR69_LO2_INA2_2: 
NetS2_MIXER1_2: 
NetS2_MIXER1_5: 
NetS2_MIXER2_2: 
NetS2_MIXER2_5: 
NetU6_6: 
NetU7_LO1_HPF_6: 
NetU7_LO1_LPF_6: 
NetU7_LO2_HPF_6: 
NetU14_MIXER1_15: 
NetU14_MIXER2_15: 
NetU19_6: 
NetU21_6: 
NetU22_6: 
NetU23_6: 
NRST: 
P0_LO1: 
P0_LO2: 
P1_LO1: 
P1_LO2: 
P2_LO1: 
P2_LO2: 
P3_LO1: 
P3_LO2: 
R1B: 
R2B: 
RADIO_NRST: 
RADIO_RX: 
RADIO_SWCLK: 
RADIO_SWDIO: 
RADIO_TX: 
REF: 
RESET_LO1: 
RESET_LO2: 
RUN: 
SCL: 
SCLK: 
SDA: 
SDIO_0: 
SDIO_1_LO1: 
SDIO_1_LO2: 
SDIO_2: 
SDIO_3_LO1: 
SDIO_3_LO2: 
SWCLK: 
SWDIO: 
SWO: 
Unused_1: 
Unused_2: 
Unused_3: 
Unused_4: 
Unused_5: 
Unused_6: 
Unused_7: 
Unused_8: 
Unused_9: 
Unused_10: 
Unused_11: 
Unused_12: 
Unused_13: 
Unused_14: 
Unused_15: 
Unused_16: 
Unused_17: 
Unused_18: 
Unused_19: 
Unused_20: 
Unused_21: 
Unused_22: 
Unused_23: 
Unused_24: 
Unused_25: 
Unused_26: 
Unused_27: 
Unused_28: 
Unused_29: 
Unused_30: 
Unused_31: 
Unused_32: 
Unused_33: 
Unused_34: 
Unused_35: 
Unused_36: 
Unused_37: 
Unused_38: 
Unused_39: 
Unused_40: 
Unused_41: 
Unused_42: 
Unused_43: 
Unused_44: 
Unused_45: 
Unused_46: 
Unused_47: 
Unused_48: 
Unused_49: 
Unused_50: 
Unused_51: 
Unused_52: 
Unused_53: 
Unused_54: 
Unused_55: 
Unused_56: 
Unused_57: 
USART1_RX: 
USART1_TX: 
USBDM: 
USBDP: 
VBUS: 
VIN: 
XTAL+_LO1: 
XTAL+_LO2: 
XTAL-_LO1: 
XTAL-_LO2: 
pads on no net: "U26_Negative DC-DC1.8" "U26_Negative DC-DC1.9" "U26_Negative DC-DC2.8" "U26_Negative DC-DC2.9"

## Polygon pours and split planes (outlines as drawn)
GND on Top Layer "NONET_L-01_P-001" (solid, pour order 94): 73.784,93.955 -0.003,93.955 -0.003,0.102 73.784,0.102
"NetC130_Negative DC-DC1_1" on Top Layer "NONET_L-01_P-001" (solid, pour order 93): 64.101,34.239 64.101,31.318 63.937,31.154 61.004,31.154 61.004,32.048 60.362,32.69 43.595,32.69 40.301,35.984 40.301,45.136 41.063,45.898 45.534,45.898 46.016,45.415 46.016,44.171 45.508,43.663 41.774,43.663 41.774,42.35 41.774,40.97 41.774,39.065 43.718,37.122 46.194,39.599 58.792,39.599 64.076,34.315
"NetC133_Negative DC-DC1_2" on Top Layer "NONET_L-01_P-001" (solid, pour order 92): 52.163,64.287 59.072,64.287 59.072,61.163 62.806,57.429 62.806,44.171 58.883,40.248 43.538,40.248 42.968,40.818 42.968,42.959 43.43,43.421 46.226,43.421 47.165,44.36 47.165,45.466 50.891,45.466 51.127,45.23 51.127,43.353 52.188,42.291 59.323,42.291 60.697,43.665 60.697,56.82 56.938,60.579 52.138,60.579
"NetC130_Negative DC-DC2_1" on Top Layer "NONET_L-01_P-001" (solid, pour order 91): 32.351,33.858 32.351,30.937 32.187,30.773 29.254,30.773 29.254,31.667 28.612,32.309 10.507,32.309 6.763,36.053 6.763,43.04 6.836,43.04 9.313,45.517 13.784,45.517 14.266,45.034 14.266,43.79 13.758,43.282 10.024,43.282 8.678,41.935 8.754,41.859 8.754,36.83 10.405,35.179 14.444,39.218 27.042,39.218 32.326,33.934
"NetC133_Negative DC-DC2_2" on Top Layer "NONET_L-01_P-001" (solid, pour order 90): 20.413,63.906 27.322,63.906 27.322,60.782 31.056,57.048 31.056,43.79 27.133,39.867 11.788,39.867 11.218,40.437 11.218,42.578 11.68,43.04 14.476,43.04 15.415,43.979 15.415,45.085 19.141,45.085 19.377,44.849 19.377,42.972 20.438,41.91 27.573,41.91 28.947,43.284 28.947,56.439 25.188,60.198 20.388,60.198
"NetC130_Negative DC-DC1_2" on Top Layer "NONET_L-01_P-001" (solid, pour order 27): 49.908,25.756 51.432,25.756 51.432,27.407 53.337,29.312 59.56,29.312 59.56,30.582 58.29,30.582 57.782,30.074 50.67,30.074 49.908,29.312
"NetC130_Negative DC-DC1_2" on Top Layer "NONET_L-01_P-001" (solid, pour order 57): 9.776,27.28 9.776,31.471 10.284,31.979 15.618,31.979 16.253,31.344 16.253,29.82 17.015,29.058 22.222,29.058 22.73,28.55 22.73,25.629 20.444,25.629 18.158,27.915 14.602,27.915 14.475,27.788
"NetC98_Negative DC-DC1_2" on Top Layer "NONET_L-01_P-001" (solid, pour order 55): 3.68,75.921 2.791,75.921 2.791,84.684 4.315,86.208 5.839,86.208 6.855,87.224 42.923,87.224 42.923,83.795 41.907,82.779 29.842,82.779 26.794,85.827 7.49,85.827 7.49,85.7 5.712,83.922 4.696,83.922 3.807,83.033 3.807,76.048
"NetC98_Negative DC-DC2_2" on Top Layer "NONET_L-01_P-001" (solid, pour order 54): 4.188,79.223 4.188,82.652 5.077,83.541 10.538,83.541 10.411,83.414 10.411,79.223
NetC145_1 on Top Layer "NONET_L-01_P-001" (solid, pour order 53): 6.093,22.2 6.093,19.787 1.902,19.787 0.378,21.311 0.378,70.587 4.061,74.27 4.061,78.715 4.188,78.842 6.093,78.842 6.22,78.715 6.22,73.889 2.029,69.698 2.029,23.47 3.299,22.2
"NetC138_Negative DC-DC2_2" on Top Layer "NONET_L-01_P-001" (solid, pour order 32): 32.509,31.725 32.509,33.884 37.208,33.884 39.621,31.471 39.621,30.074 40.51,29.185 40.51,27.661 38.859,27.661 38.859,29.058 38.224,29.693 33.906,29.693 33.906,31.725
"NetC138_Negative DC-DC1_2" on Top Layer "NONET_L-01_P-001" (solid, pour order 29): 61.211,31.725 62.481,31.725 62.481,29.82 68.196,29.82 68.704,29.312 68.704,28.042 70.228,28.042 70.228,30.455 67.561,33.122 67.561,34.265 62.1,34.265 61.211,33.376
"NetC130_Negative DC-DC1_2" on Top Layer "NONET_L-01_P-001" (solid, pour order 28): 20.825,25.629 22.349,25.629 22.349,27.28 24.254,29.185 30.477,29.185 30.477,30.455 29.207,30.455 28.699,29.947 21.587,29.947 20.825,29.185
"NetC97_Negative DC-DC1_2" on Top Layer "NONET_L-01_P-001" (solid, pour order 26): 45.844,65.253 46.225,64.872 46.225,63.221 45.844,62.84 43.177,62.84 42.669,62.332 42.669,56.998 46.098,53.569 46.098,51.41 49.908,47.6 59.179,47.6 59.814,46.965 59.814,43.79 58.925,42.901 52.448,42.901 51.432,43.917 51.432,45.568 50.924,46.076 41.907,46.076 41.018,46.965 41.018,65.253
"NetC135_Negative DC-DC1_1" on Top Layer "NONET_L-01_P-001" (solid, pour order 24): 43.297,62.332 49.52,62.332 49.901,62.713 49.901,64.872 47.488,67.285 47.488,78.334 47.869,78.715 49.774,78.715 50.155,78.334 50.155,67.412 51.298,66.269 51.298,60.173 51.171,60.046 43.297,60.046
"NetC98_Negative DC-DC1_2" on Top Layer "NONET_L-01_P-001" (solid, pour order 23): 58.798,79.35 52.321,79.35 52.321,83.287 51.686,83.922 45.209,83.922 43.939,82.652 43.939,75.667 46.225,73.381 46.225,66.015 45.717,65.507 43.431,65.507 43.05,65.888 43.05,69.444 43.812,70.206 43.812,73.889 43.304,74.397 41.78,74.397 41.145,75.032 41.145,83.922 42.669,85.446 58.417,85.446 58.798,85.065
no net on Top Layer "NONET_L-01_P-001" (solid, pour order 22): 7.307,45.466
"NetC97_Negative DC-DC2_2" on Top Layer "NONET_L-01_P-001" (solid, pour order 20): 14.094,64.872 14.475,64.491 14.475,62.84 14.094,62.459 11.427,62.459 10.919,61.951 10.919,56.617 14.348,53.188 14.348,51.029 18.158,47.219 27.429,47.219 28.064,46.584 28.064,43.409 27.175,42.52 20.698,42.52 19.682,43.536 19.682,45.187 19.174,45.695 10.157,45.695 9.268,46.584 9.268,64.872
"NetC135_Negative DC-DC2_1" on Top Layer "NONET_L-01_P-001" (solid, pour order 19): 11.554,62.205 17.777,62.205 18.158,62.586 18.158,64.745 15.745,67.158 15.745,78.207 16.126,78.588 18.031,78.588 18.412,78.207 18.412,67.285 19.555,66.142 19.555,60.046 19.428,59.919 11.554,59.919
"NetC98_Negative DC-DC2_2" on Top Layer "NONET_L-01_P-001" (solid, pour order 18): 27.048,78.969 20.571,78.969 20.571,82.906 19.936,83.541 13.459,83.541 12.189,82.271 12.189,75.286 14.475,73 14.475,65.634 13.967,65.126 11.681,65.126 11.3,65.507 11.3,69.063 12.062,69.825 12.062,73.508 11.554,74.016 10.03,74.016 9.395,74.651 9.395,83.541 10.919,85.065 26.667,85.065 27.048,84.684
NetC149_1 on Top Layer "NONET_L-01_P-001" (solid, pour order 17): 11.554,8.738 11.554,13.818 10.792,14.58 10.792,18.771 10.665,18.898 6.728,18.898 6.093,19.533 4.061,19.533 3.68,19.152 3.68,12.802 6.347,10.135 6.347,8.738
NetC145_1 on Top Layer "NONET_L-01_P-001" (solid, pour order 16): 7.617,22.2 8.379,22.962 10.919,22.962 10.919,19.152 6.855,19.152 6.347,19.66 3.68,19.66 3.426,19.406 3.426,12.675 3.807,12.294 3.807,8.611 1.775,8.611 2.029,8.865 2.029,22.2
"NetC130_Negative DC-DC1_2" on Top Layer "NONET_L-01_P-001" (solid, pour order 15): 16.38,4.166 13.078,4.166 13.078,7.849 12.062,8.865 12.062,13.945 11.3,14.707 11.3,24.359 8.76,24.359 6.855,22.454 3.68,22.454 2.918,23.216 2.918,27.28 3.934,28.296 13.967,28.296 14.475,27.788 14.475,8.738 15.618,7.595 16.38,7.595
no net on Top Layer "NONET_L01_P014" (solid, pour order 14): -999.181,-1089.927
no net on Top Solder "NONET_L-01_P-001" (solid): -1013.532,-1089.927
no net on Top Solder "NONET_L-01_P-001" (solid): -1012.897,-1126.249
"NetC130_Negative DC-DC1_1" on Layer 1 "NONET_L-01_P-001" (solid, pour order 88): 67.197,29.417 51.222,29.417 51.172,29.467 51.172,51.217 67.172,51.217 67.222,51.267
no net on Layer 1 "NONET_L-01_P-001" (solid, pour order 87): 64.947,29.842
"NetC130_Negative DC-DC2_1" on Layer 2 "NONET_L-01_P-001" (solid, pour order 86): 20.022,64.992 19.997,64.967 19.997,29.167 40.747,29.167 39.947,29.967 39.947,64.992
"NetC130_Negative DC-DC1_2" on Layer 2 "NONET_L-01_P-001" (solid, pour order 61): 6.855,22.454 3.68,22.454 2.918,23.216 2.918,27.534 3.934,28.55 26.032,28.55 29.715,24.867 40.891,24.867 42.415,26.391 42.415,31.471 43.05,32.106 44.574,32.106 45.209,31.471 45.209,30.455 45.59,30.074 51.305,30.074 51.94,29.439 51.94,25.756 50.035,23.851 8.252,23.851
GND on Bottom Layer "NONET_L-01_P-001" (solid, pour order 79): -0.003,93.93 -0.029,93.904 -0.029,0.102 73.758,0.102 73.784,0.127 73.784,93.98
"NetC130_Negative DC-DC1_1" on Bottom Layer "NONET_L-01_P-001" (solid, pour order 62): 53.972,14.072 53.972,20.93 47.495,27.407 47.495,43.978 44.634,46.839 41.145,43.35 41.145,37.44 42.542,36.043 42.542,24.359 47.368,19.533 47.368,14.072
"NetC130_Negative DC-DC2_1" on Bottom Layer "NONET_L-01_P-001" (solid, pour order 59): 25.143,11.024 25.143,18.517 17.904,25.756 17.904,29.439 15.364,31.979 15.364,45.568 9.141,45.568 9.141,33.757 9.268,11.151 18.285,11.151

## Silkscreen, mask and mechanical layers (free items; w line width, h text height)
Top Overlay:
  lines w0.152: 17.924,63.373 18.991,64.44 18.991,64.694 ; 22.978,10.236 23.817,9.398 23.817,8.077
  text "P/N: 000-000-003" at 67.911,7.865 h1.52 r90
  text "DESIGN: A DI GIROLAMO" at 70.578,7.865 h1.52 r90
Boardshape:
  lines w0.025: 3.782,93.955 4.067,93.955 ; 3.782,93.955 3.801,93.956 4.067,93.955 ; 3.782,93.955 -0.013,93.955 -0.013,93.98 3.826,93.98 4.092,93.971 4.62,93.9 5.133,93.759 5.622,93.55 6.079,93.278 6.496,92.947 6.865,92.563 7.179,92.133 7.432,91.665 7.621,91.168 7.741,90.649 7.764,90.409 7.764,88.944 44.582,88.944 44.582,90.289 44.649,90.785 44.79,91.298 44.998,91.788 45.271,92.245 45.602,92.662 45.986,93.03 46.415,93.344 46.883,93.598 47.381,93.786 47.899,93.907 48.409,93.955 ; 3.782,93.955 3.271,93.907 2.753,93.786 2.255,93.598 1.787,93.344 1.358,93.03 0.974,92.662 0.643,92.245 0.371,91.788 0.162,91.298 0.021,90.785 -0.012,90.541 0,3.181 0.092,2.781 0.281,2.283 0.535,1.815 0.849,1.386 1.217,1.002 1.634,0.671 2.091,0.399 2.581,0.19 3.094,0.049 3.455,0 19.016,0 19.016,6.821 66.082,6.821 66.082,2.707 66.24,2.29 66.494,1.822 66.808,1.392 67.177,1.008 67.593,0.677 68.05,0.405 68.54,0.196 69.053,0.055 69.461,0 70.178,0 70.513,0.031 71.031,0.152 71.529,0.34 71.997,0.594 72.427,0.908 72.811,1.277 73.142,1.693 73.414,2.15 73.622,2.64 73.764,3.153 73.835,3.68 73.839,3.817 73.837,93.98 44.582,93.98 44.582,93.955 48.409,93.955 ; 4.067,93.955 4.067,93.955 ; 4.067,93.955 4.067,93.955 ; 48.409,93.955 48.695,93.955 ; 48.409,93.955 48.429,93.956 48.695,93.955 ; 48.695,93.955 48.695,93.955 ; 48.695,93.955 48.695,93.955 ; 73.779,90.114 73.781,90.094 73.779,89.828 73.779,90.114 ; 73.779,90.114 73.779,93.955 69.816,93.955 70.082,93.946 70.609,93.874 71.123,93.733 71.612,93.525 72.069,93.252 72.486,92.921 72.855,92.538 73.169,92.108 73.422,91.64 73.611,91.142 73.731,90.624 73.779,90.114
DIMENSIONS:
  lines w0.152: 2.029,32.868 62.735,32.868 ; 7.764,88.276 43.428,88.276 43.428,92.789 44.18,93.541 44.18,93.955

## Text inside footprints (layer, text, board x,y; h text height)
"C132_Negative DC-DC1": Top Overlay "LINE HERE" at 50.721,82.641 h0.8 r270
"C132_Negative DC-DC2": Top Overlay "LINE HERE" at 18.844,82.641 h0.8 r270
"C136_Negative DC-DC1": Top Overlay "LINE HERE" at 50.467,55.336 h0.8 r270
"C136_Negative DC-DC2": Top Overlay "LINE HERE" at 18.717,54.955 h0.8 r270
C145: Top Overlay "LINE HERE" at 7.947,19.544 h0.8 r90
C146: Top Overlay "LINE HERE" at 7.947,24.878 h0.8 r90
C149: Top Overlay "LINE HERE" at 7.947,14.21 h0.8 r90